# Altium PCB Rev5.PcbDoc (part 1 of 4)
Units mil, origin at the board's own origin, x right, y up, seen from the top; angles counter-clockwise.
Board outline 3019 x 2316 mil, 2 copper layers (Top Layer, Bottom Layer); 26 components, 37 nets, 159 pads, 132 vias.
Unrouted connection lines stored in the file: 2.
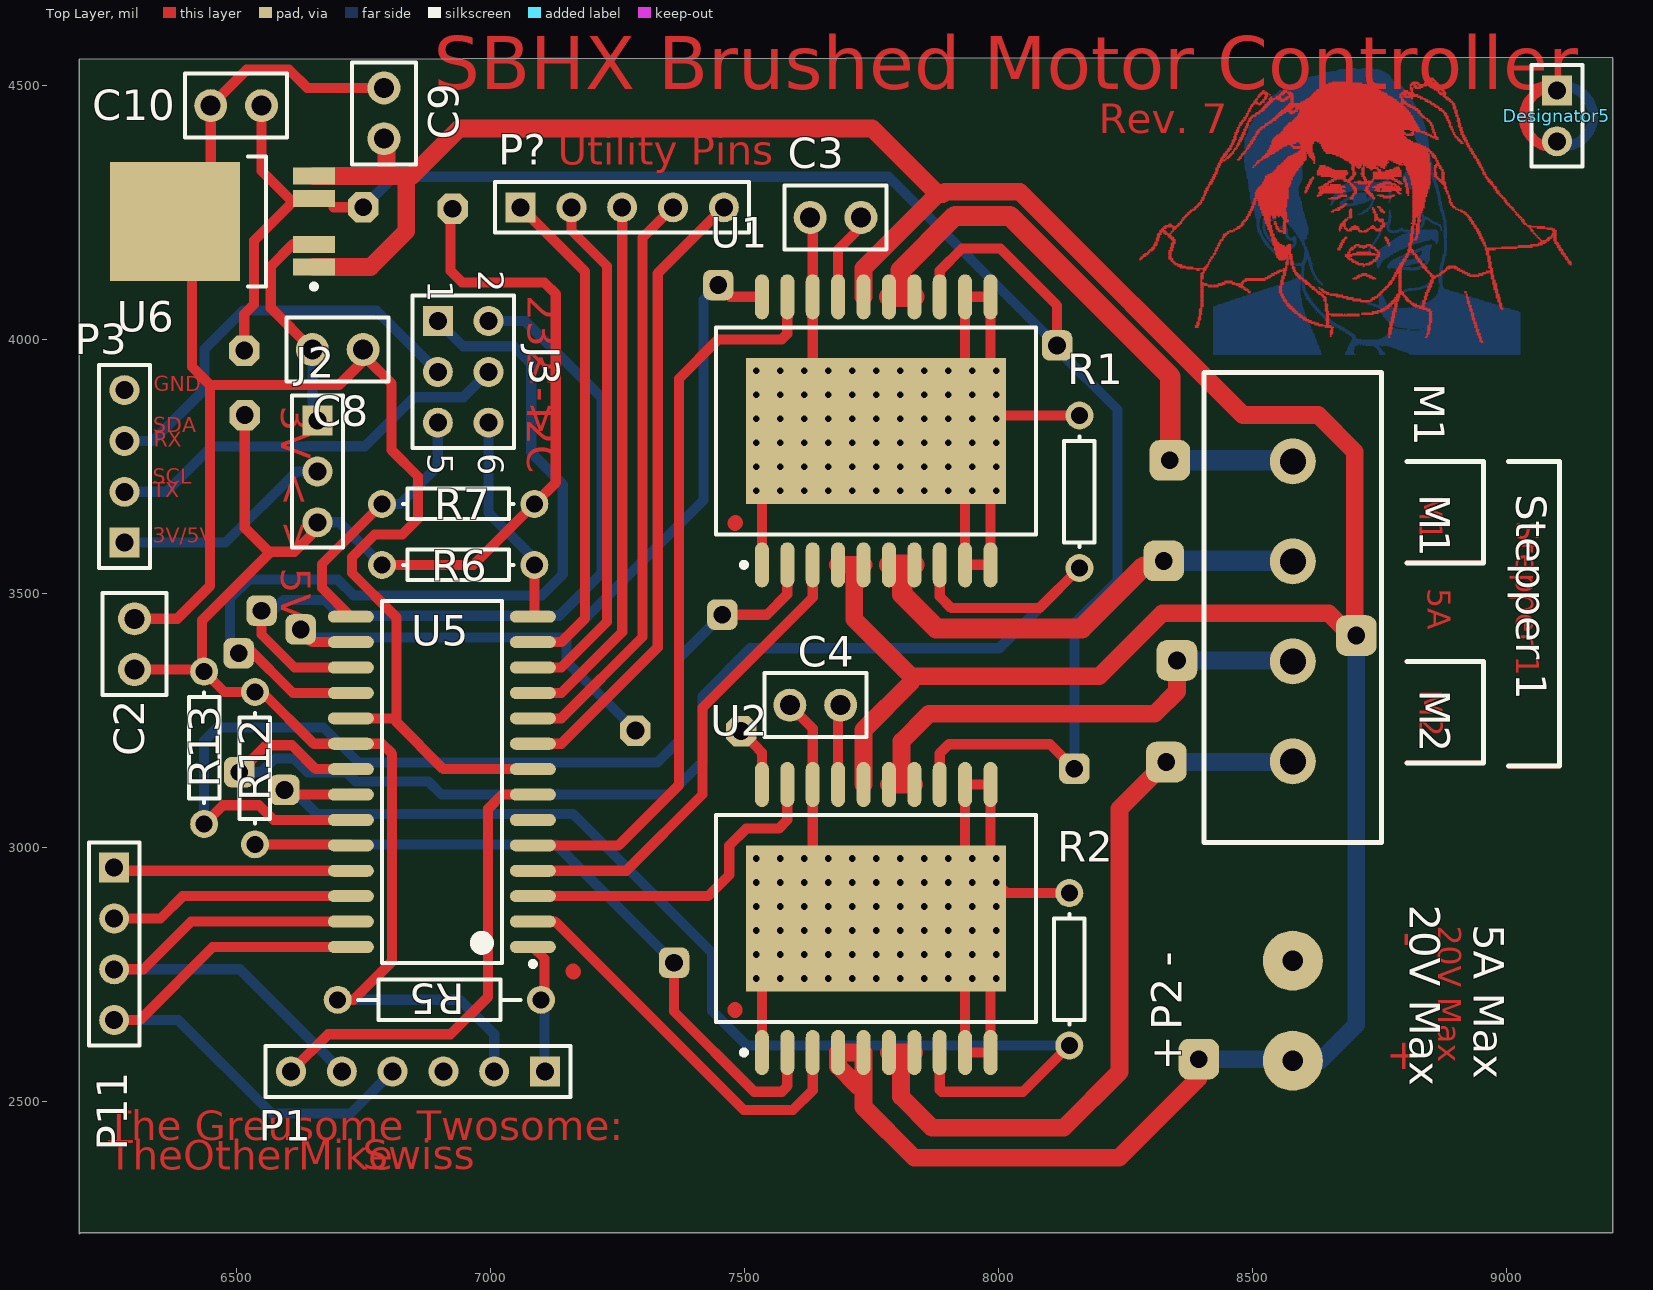
[diagram p0: Top Layer view]
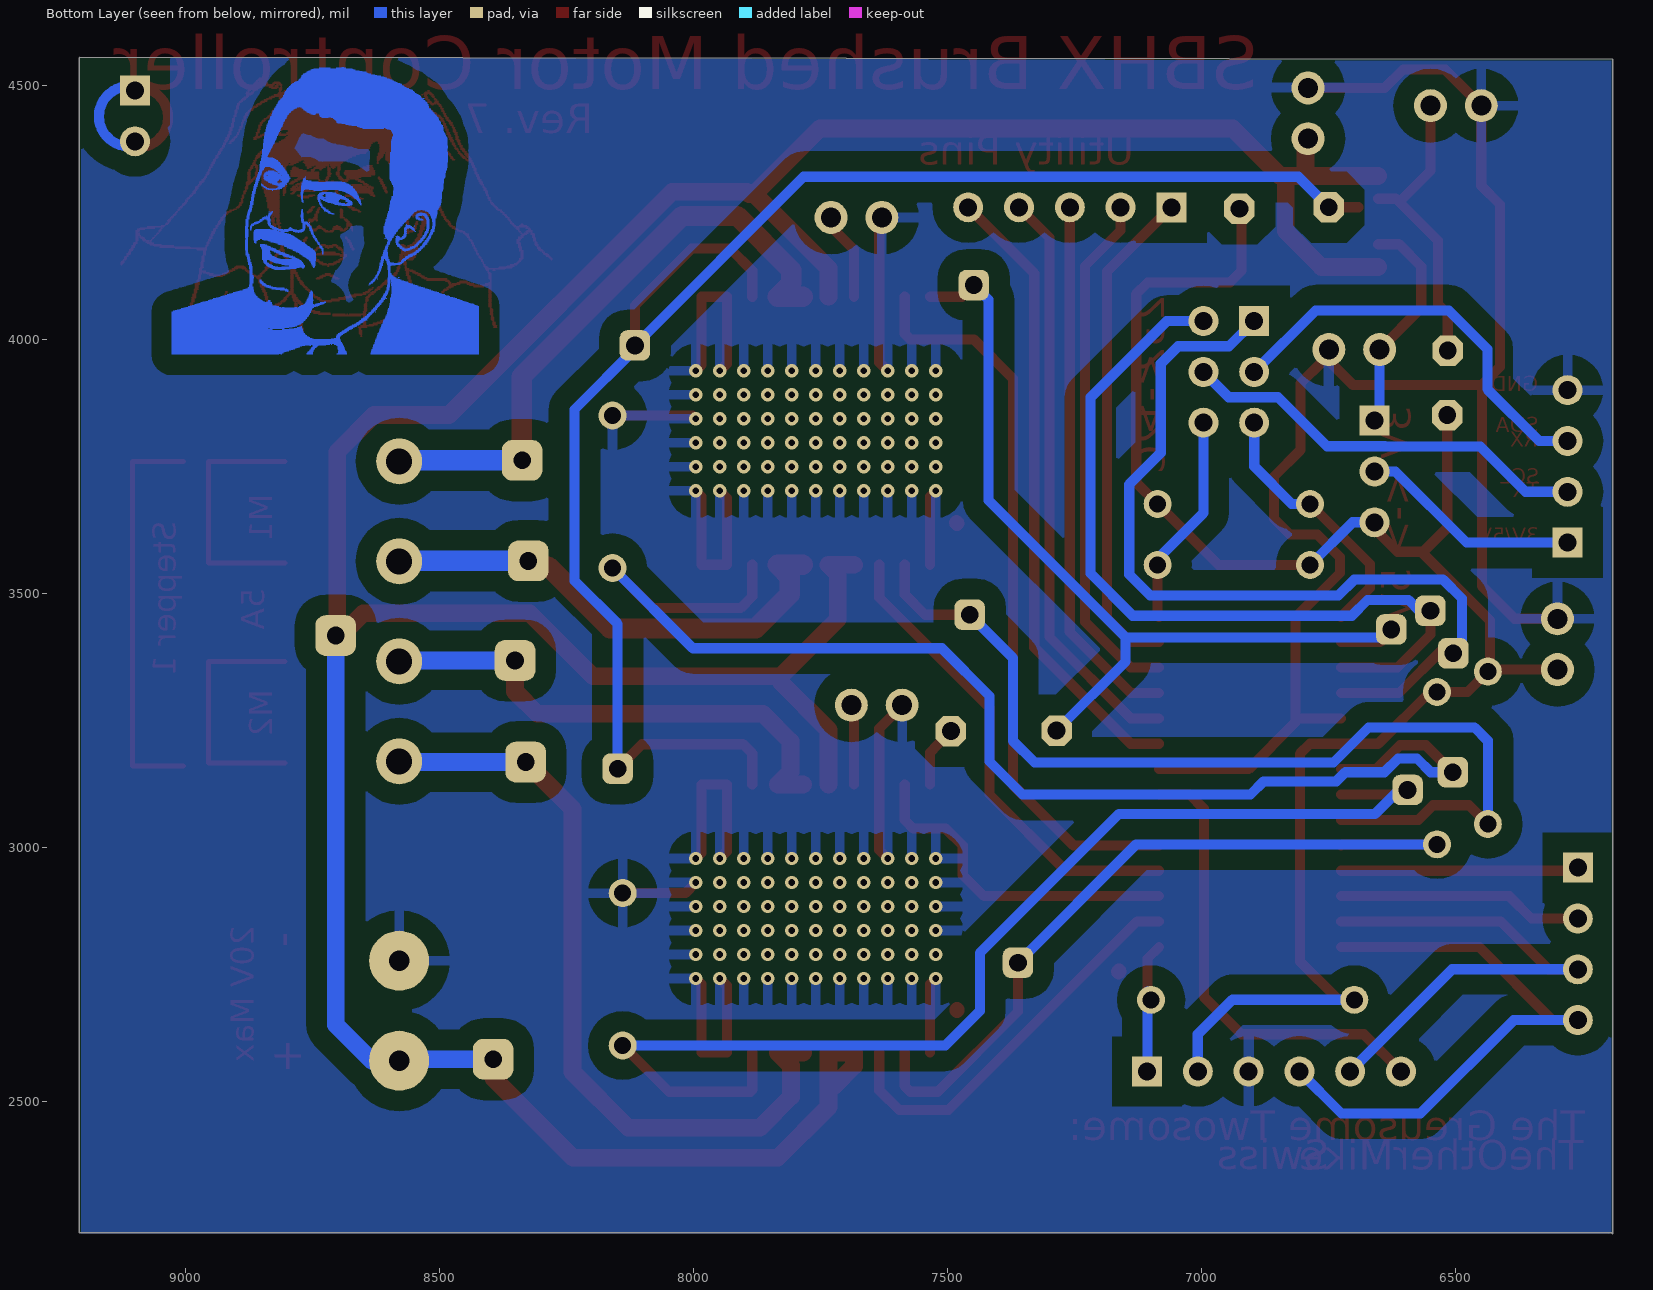
[diagram p1: Bottom Layer view, seen from below]

## Layer stack, top to bottom
Top Layer: signal copper 1.4
Dielectric: dielectric 12.6, FR-4, Dk 4.8
Bottom Layer: signal copper 1.4

## Board outline
6191,4551 6191,2239 6193,2241 9210,2241 9210,4554 9209,4555

## Design rules (kind name [scope] priority, off if disabled: settings)
Clearance "Polygon Clearance" [InPoly] p1: gap=40
Clearance [All] p2: gap=10
ComponentClearance [All] p1 off: gap=10 collisioncheckmode=3 verticalgap=10 showdistances=FALSE
HoleSize [All] p1: absolutevalues=TRUE maxlimit=100 minlimit=35 maxpercent=80.000 minpercent=20.000
MinimumSolderMaskSliver [All] p1 off: minsoldermaskwidth=10
PasteMaskExpansion [All] p1 off: expansion=0
PlaneClearance [All] p1: clearance=50
PolygonConnect [All] p1: connectstyle=Relief reliefconductorwidth=20 reliefentries=4 polygonreliefangle="90 Angle"
RoutingVias [All] p1: holewidth=28 width=50 viastyle="Through Hole" minholewidth=28 minwidth=50 maxholewidth=28 maxwidth=50
SilkToSilkClearance [All] p1 off: silktosilkclearance=7.87
SilkscreenOverComponentPads [All] p1 off: minsilkscreentomaskgap=10
SolderMaskExpansion [All] p1 off: expansion=4
Width "High Current Traces" [InNetClass('High Current')] p1: maxlimit=100 minlimit=25 preferedwidth=50 minimp=50.000000 maximp=50.000000 favimp=50.000000 checkconnectedcopper=TRUE
Width [All] p2: maxlimit=30 minlimit=20 preferedwidth=20
21 further rules are at their usual default settings.

## Classes and differential pairs
net class "High Current": NetM1_1 NetM1_2 NetM1_3 NetM1_4 VPWR

## Components (designator, comment, footprint, x,y, rotation, side; value= is the part's Value field where it differs from the comment)
C2 "Filtering" CAPR2.54-5.1x3.2 6300,3400 r90 top
C3 "Cap" CAPR2.54-5.1x3.2 7680,4240 r0 top
C4 "Cap" CAPR2.54-5.1x3.2 7640,3280 r0 top
C8 "Filtering" CAPR2.54-5.1x3.2 6700,3980 r180 top
C9 "Filtering" CAPR2.54-5.1x3.2 6791,4445 r270 top
C10 "Filtering" CAPR2.54-5.1x3.2 6500,4460 r0 top
Designator5 "Comment" BAT-2 9100,4440 r270 top
J2 "Serial Bus Voltage" HDR1X3 6660,3840 r270 top
J3 "232 / I2C Select" HDR2X3 6897,4036 r270 top
M1 "Motor Header" "MOTOR HEADER" 8580,3760 r270 top
P1 "ICSP" HDR1X6 7108,2559 r180 top
P2 "Power Header" "POWER HEADER" 8580,2580 r90 top
P3 "Serial In" HDR1X4 6280,3600 r90 top
P11 "Header 4" HDR1X4 6260,2960 r270 top
P? "Aux Header" HDR1X5 7060,4260 r0 top
R1 "Current Sense" AXIAL-0.3 8160,3700 r270 top
R2 "Current Sense" AXIAL-0.3 8140,2760 r270 top
R5 "PullUp" AXIAL-0.4 6900,2700 r0 top
R6 "Res1" AXIAL-0.3 6937,3556 r180 top
R7 "Res1" AXIAL-0.3 6937,3676 r0 top
R12 "PullUp" AXIAL-0.3 6537,3156 r270 top
R13 "PullUp" AXIAL-0.3 6437,3196 r270 top
U1 "MC33887" "HSOP20 FREESCALE" 7760,3820 r90 top
U2 "MC33887" "HSOP20 Freescale" 7760,2860 r90 top
U5 "PIC18F2221-E/SO" SOIC-SO28_N 6905,3129 r180 top
U6 "TLE4476" PG-TO252-5-1 6474,4232 r180 top

## Footprints (in the part's own frame and the unit in brackets; to place one, negate y for a bottom-side part, rotate by r counter-clockwise, add the part's x,y. Pads: shape width x height; smd on the part's side, far side on the other; paste and mask are expansions set on the pad)
AXIAL-0.3 [mm] "Axial Device, Thru-Hole; 2 Leads; 0.3 in Pin Spacing"
  round 1.4 hole 0.85: 1(-3.81,0) 2(3.81,0)
  silkscreen extent -2.77,-0.76 2.77,0.76
AXIAL-0.4 [mm] "Axial Device, Thru-Hole; 2 Leads; 0.4 in Pin Spacing"
  round 1.4 hole 0.85: 1(-5.08,0) 2(5.08,0)
  silkscreen extent -4.06,-1.02 4.06,1.02
BAT-2 [mm] "Multicell Battery; 2 Leads"
  rect 1.5x1.5 hole 0.9: 1(-1.27,0)
  round 1.5 hole 0.9: 2(1.27,0)
  silkscreen extent -2.54,-1.27 2.54,1.27
CAPR2.54-5.1x3.2 [mm] "Capacitor, Ceramic, Thru-Hole, Dipped Radial; Body 5.1 x 3.2 mm (WxT) Pin Spacing 2.54 mm (typ)"
  round 1.65 hole 1: 1(-1.27,0) 2(1.27,0)
  silkscreen extent -2.55,-1.6 2.55,1.6
HDR1X3 [mm] "Connector; Header; 3 Position"
  rect 1.5x1.5 hole 0.9: 1(0,0)
  round 1.5 hole 0.9: 2(2.54,0) 3(5.08,0)
  silkscreen extent -1.27,-1.27 6.35,1.27
HDR1X4 [mm] "Connector; Header; 4 Position"
  rect 1.5x1.5 hole 0.9: 1(0,0)
  round 1.5 hole 0.9: 2(2.54,0) 3(5.08,0) 4(7.62,0)
  silkscreen extent -1.27,-1.27 8.89,1.27
HDR1X5 [mm] "Connector; Header; 5 Position"
  rect 1.5x1.5 hole 0.9: 1(0,0)
  round 1.5 hole 0.9: 2(2.54,0) 3(5.08,0) 4(7.62,0) 5(10.16,0)
  silkscreen extent -1.27,-1.27 11.43,1.27
HDR1X6 [mm] "Connector; Header; 6 Position"
  rect 1.5x1.5 hole 0.9: 1(0,0)
  round 1.5 hole 0.9: 2(2.54,0) 3(5.08,0) 4(7.62,0) 5(10.16,0) 6(12.7,0)
  silkscreen extent -1.27,-1.27 13.97,1.27
HDR2X3 [mm] "Connector; Header; 3x2 Position"
  rect 1.5x1.5 hole 0.9: 1(0,0)
  round 1.5 hole 0.9: 2(0,2.54) 3(2.54,0) 4(2.54,2.54) 5(5.08,0) 6(5.08,2.54)
  silkscreen extent -1.27,-1.27 6.35,3.81
"HSOP20 FREESCALE" [mm] "SOP, 20-Leads, Body 16.0x11.1mm (max), Pitch 1.27mm, IPC Low Density"
  oval 2.25x0.7 smd: 1(-6.7,5.715) 2(-6.7,4.445) 3(-6.7,3.175) 4(-6.7,1.905) 5(-6.7,0.635) 6(-6.7,-0.635) 7(-6.7,-1.905) 8(-6.7,-3.175) 9(-6.7,-4.445) 10(-6.7,-5.715) 11(6.7,-5.715) 12(6.7,-4.445) 13(6.7,-3.175) 14(6.7,-1.905) 15(6.7,-0.635) 16(6.7,0.635) 17(6.7,1.905) 18(6.7,3.175) 19(6.7,4.445) 20(6.7,5.715)
  rect 7.3x13 smd: 21(0,0)
  silkscreen extent -6.82,-8 5.18,8, body extent -5.55,-8 5.55,8, height 3.4
"HSOP20 Freescale" [mm] "SOP, 20-Leads, Body 16.0x11.1mm (max), Pitch 1.27mm, IPC Low Density"
  oval 2.25x0.7 smd: 1(-6.7,5.715) 2(-6.7,4.445) 3(-6.7,3.175) 4(-6.7,1.905) 5(-6.7,0.635) 6(-6.7,-0.635) 7(-6.7,-1.905) 8(-6.7,-3.175) 9(-6.7,-4.445) 10(-6.7,-5.715) 11(6.7,-5.715) 12(6.7,-4.445) 13(6.7,-3.175) 14(6.7,-1.905) 15(6.7,-0.635) 16(6.7,0.635) 17(6.7,1.905) 18(6.7,3.175) 19(6.7,4.445) 20(6.7,5.715)
  rect 7.3x13 smd: 21(0,0)
  silkscreen extent -6.82,-8 5.18,8, body extent -5.55,-8 5.55,8, height 3.4
"MOTOR HEADER" [mm] "Custom header for motor connections"
  round 2.3 hole 1.3: 1(0,0) 2(5,0) 3(10,0) 4(15,0)
  Top Layer lines w0.254: 15.08,5.715 15.08,9.525 10,9.525 10,5.715 ; 5.08,5.715 5.08,9.525 0,9.525 0,5.715 ; 15.24,10.795 15.24,13.335 0,13.335 0,10.795
  silkscreen extent -4.45,-4.45 19.05,13.34, body extent -2.49,-4.56 17.51,4.44, height 15.2
PG-TO252-5-1 [mm] "D-PAK, 5-Pads, Body 6.2x6.5mm (max), IPC Low Density"
  rect 2.1x0.85 smd: 1(-4.55,2.28) 2(-4.55,1.14) 4(-4.55,-1.14) 5(-4.55,-2.28)
  rect 6.5x5.95 smd: 3(2.4,0)
  silkscreen extent -4.67,-3.25 -1.25,3.38, body extent -2.15,-3.25 4.07,3.25, height 2.38
"POWER HEADER" [mm] "Custom header for power in"
  round 3 hole 1.016: 1(0,0) 2(5,0)
  body extent -2.49,-4.55 7.51,4.45, height 15.2
SOIC-SO28_N [mm] "SOIC, 28-Leads, Body 17.9x7.5mm, Pitch 1.27mm, IPC Medium Density"
  oval 2.3x0.6 smd: 1(-4.55,8.255) 2(-4.55,6.985) 3(-4.55,5.715) 4(-4.55,4.445) 5(-4.55,3.175) 6(-4.55,1.905) 7(-4.55,0.635) 8(-4.55,-0.635) 9(-4.55,-1.905) 10(-4.55,-3.175) 11(-4.55,-4.445) 12(-4.55,-5.715) 13(-4.55,-6.985) 14(-4.55,-8.255) 15(4.55,-8.255) 16(4.55,-6.985) 17(4.55,-5.715) 18(4.55,-4.445) 19(4.55,-3.175) 20(4.55,-1.905) 21(4.55,-0.635) 22(4.55,0.635) 23(4.55,1.905) 24(4.55,3.175) 25(4.55,4.445) 26(4.55,5.715) 27(4.55,6.985) 28(4.55,8.255)
  silkscreen extent -4.67,-9.05 3,9.23, body extent -3.8,-9.06 3.8,9.06, height 2.65

## Part data
C2 C8 C9 C10: library part Cap, "Capacitor"
C3 C4: "Capacitor"
J2: library part "Header 3", "Header, 3-Pin"
J3: library part "Header 3X2", "Header, 3-Pin, Dual row"
P1: library part "Header 6", "Header, 6-Pin"
P3: library part "Header 4", "Header, 4-Pin"
P11: "Header, 4-Pin"
P?: library part "Header 5", "Header, 5-Pin"
R1: library part Res1, "1% Non Wirewound"
R2 R5 R12 R13: library part Res1, "Resistor"
R6 R7: "Resistor"
U1 U2: "H-Bridge"
U5: "Enhanced Flash Microcontroller with 10-Bit A/D and nanoWatt Technology, 4K Flash, 28-Pin SOIC, Extended Temperature Range"
U6: "3V3 / 5V0 LDO regulator"

## Free pads (board coordinates)
  rrect50% 80x80 hole 35: 0(8331,3168) 1(8352,3368) 2(8326,3564) 3(8338,3762) 6(8395,2583) 7(8705,3417)
  oct 60x60 hole 35: 1(6750,4260) 4(6516,3978) 4(6926,4257) 5(6517,3851) 7(7286,3230) 8(7494,3229)
  rrect50% 60x60 hole 35: 2(7362,2773) 9(6595,3113) 10(6506,3148) 11(6505,3382) 14(7457,3458) 15(7449,4107) 16(8116,3988) 17(8150,3155) 18(6550,3466) 19(6627,3429)

## Via types
v1: diameter 25.98, hole 12.99, Top Layer to Bottom Layer, tented top, 132 vias

## Nets (pads, with @x,y where several pads share a name; then routed paths per layer and width w, separated by ;. In a path a pad name is that pad's centre, name@x,y a point inside that pad or via, vN(x,y) a via of type N, cw(c..) or ccw(c..) an arc to the next point about the centre after c; other vN are vias at no path point)
3V3: C8.2 J2.1 U6.2 | length 444.8
  Top Layer w20: C8.2@6650,3980 6568,4062 6568,4143.46 6611.66,4187.12 U6.2@6653.13,4187.12
  Bottom Layer w20: C8.2@6650,3980 6650,3850 J2.1@6660,3840
3V3/5V0: J2.2 P3.1 | length 438
  Bottom Layer w20: P3.1@6280,3600 6479,3600 6619,3740 J2.2@6660,3740
5V0: C2.1 C10.2 J2.3 P1.2 pad.1@6750,4260 pad.4 pad.5 pad.16 pad.17 R5.1 R6.2 R7.2 R12.1 R13.1 U1.13 U2.13 U5.20 U6.4 | length 7389.2
  Top Layer w20: C2.1@6300,3350 R13.1@6433,3350 ; pad.4@6516,3978 6516,4050 6535,4069 6535,4194 6617.88,4276.88 U6.4@6653.13,4276.88 ; pad.5@6517,3851 6517,3629 6564,3582 ; C10.2@6550,4460 6550,4332 6605.12,4276.88 ; J2.3@6660,3640 6660,3627 6615,3582 6568,3582 6433,3447 R13.1@6433,3350 ; 6692,4260 pad.1@6750,4260 ; R5.1@6701,2700 6731,2700 6807,2776 6807,3184 6787,3204 U5.20@6725.87,3204 6653,3204 6551,3306 R12.1@6537,3306 6477,3306 R13.1@6437,3346 R13.1@6433,3350 ; R6.2@6787,3556 6967,3556 R7.2@7087,3676 7129,3718 7129,4089.6 7106.6,4112 6945,4112 6922,4135 pad.4@6922,4257 ; U2.13@7885,3123.78 7885,3185 7903,3203 8102,3203 pad.17@8150,3155 ; U1.13@7885,4083.78 7885,4135 7929,4179 8004,4179 8116,4067 pad.16@8116,3988
  Bottom Layer w20: J2.3@6660,3640 6703,3640 R6.2@6787,3556 ; R5.1@6700,2700 6940,2700 7008,2632 P1.2@7008,2559 ; pad.1@6750,4260 6810,4320 7784,4320 pad.16@8116,3988 8112.44,3984.44 8235,3861.88 8235,3525.01 8150,3440.01 pad.17@8150,3155
9: P?.5 U5.9 | length 1244.4
  Top Layer w20: U5.9@7084.13,3204 7140,3204 7330,3394 7330,4130 P?.5@7460,4260
10: P?.4 U5.10 | length 1153
  Top Layer w20: U5.10@7084.13,3254 7140,3254 7300,3414 7300,4200 P?.4@7360,4260
11: P?.3 U5.11 | length 1061.6
  Top Layer w20: U5.11@7084.13,3304 7140,3304 7260,3424 P?.3@7260,4260
12: P?.2 U5.12 | length 1028.1
  Top Layer w20: U5.12@7084.13,3354 7140,3354 7230,3444 7230,4144.43 7160,4214.43 P?.2@7160,4260
13: P?.1 U5.13 | length 983.9
  Top Layer w20: P?.1@7060,4260 7187,4133 7187,3451 7140,3404 U5.13@7084.13,3404
AUX: P1.6 U5.7 | length 918.6
  Top Layer w20: P1.6@6608,2559 6681,2632 6922,2632 6996,2706 6996,3076 7024,3104 U5.7@7084.13,3104
EN: pad.7@7286,3230 pad.8 pad.15 pad.19 U1.20 U2.20 U5.16 | length 1875
  Top Layer w20: pad.19@6640,3413 6649,3404 U5.16@6725.87,3404 ; pad.15@7449,4107 7472.22,4083.78 U1.20@7535,4083.78 ; pad.8@7494,3230 7535,3187 U2.20@7535,3123.78
  Bottom Layer w20: pad.19@6640,3413 7150,3413 ; pad.7@7286,3230 7150,3366 7150,3413 ; pad.15@7449,4107 7420,4078 7420,3683 7150,3413
ENC0: P11.1 U5.25 | length 459.9
  Top Layer w20: P11.1@6266,2954 U5.25@6725.87,2954
ENC1: P11.2 U5.26 | length 484.1
  Top Layer w20: P11.2@6260,2860 6351,2860 6395,2904 U5.26@6725.87,2904
ENC2/PGC: P1.5 P11.3 U5.27 | length 1036.1
  Top Layer w20: P11.3@6260,2760 6317.57,2760 6411.57,2854 U5.27@6725.87,2854
  Bottom Layer w20: P11.3@6260,2760 6507,2760 P1.5@6708,2559
ENC3/PGD: P1.4 P11.4 U5.28 | length 1184.1
  Top Layer w20: P11.4@6260,2660 6310,2660 6454,2804 U5.28@6725.87,2804
  Bottom Layer w20: P11.4@6260,2660 6386,2660 6570,2476 6725,2476 P1.4@6808,2559
FAULT0: pad.14 R13.2 U1.2 U5.23 | length 1958.4
  Top Layer w20: R13.2@6437,3046 6474,3083 6545,3083 6574,3054 U5.23@6725.87,3054 ; pad.14@7457,3458 7545,3458 7585,3498 U1.2@7585,3556.22
  Bottom Layer w20: R13.2@6437,3046 6437,3210 6463,3236 6672,3236 6741,3167 7329,3167 7372,3210 7372,3373 pad.14@7457,3458
FAULT1: pad.2@7362,2773 R12.2 U2.2 U5.24 | length 1569.3
  Top Layer w20: R12.2@6537,3006 6723.87,3006 U5.24@6725.87,3004 ; pad.2@7362,2773 7362,2677 7520,2519 7574,2519 7585,2530 U2.2@7585,2596.22
  Bottom Layer w20: R12.2@6537,3006 7129,3006 pad.2@7364,2771
GND: C2.2 C3.1 C4.1 C8.1 C9.1 C10.1 P1.3 P2.2 P3.4 R1.1 R2.1 U1.1 U1.9 U1.10 U1.11 U1.12 U1.18 U1.21 U2.1 U2.9 U2.10 U2.11 U2.12 U2.18 U2.21 U5.8 U5.19 U6.3 | length 5795.8
  Top Layer w20: C2.2@6300,3450 6384,3450 6448.8,3514.8 6448.8,3910 ; U5.19@6725.87,3254 6816,3254 6816,3452 6728,3540 6728,3571 6773,3616 6827,3616 6858,3647 6858,3730 6806,3782 6806,3913 6761,3958 6750,3958 6702,3910 6448.8,3910 ; C9.1@6791,4495 6640,4495 6604,4531 6521,4531 C10.1@6450,4460 6450,4302.49 6413,4265.49 6413,3945.8 6448.8,3910 ; 6816,3246 6908,3154 U5.8@7084.13,3154 ; v1(7523.78,2741.89) 7535,2730.67 U2.1@7535,2596.22 ; v1(7523.78,3701.89) 7535,3690.67 U1.1@7535,3556.22 ; C4.1@7590,3280 7590,3279 7635,3234 U2.18@7635,3123.78 7635,2994.84 v1(7618.27,2978.11) ; v1(7618.27,3938.11) 7635,3954.84 U1.18@7635,4083.78 7635,4235 C3.1@7630,4240 ; v1(7948.98,2741.89) 7935,2727.91 U2.9@7935,2596.22 U2.10@7985,2596.22 7985,2730.67 v1(7996.22,2741.89) ; v1(7948.98,2978.11) 7935,2992.09 U2.12@7935,3123.78 U2.11@7985,3123.78 7985,2989.33 v1(7996.22,2978.11) ; v1(7948.98,3701.89) 7935,3687.91 U1.9@7935,3556.22 U1.10@7985,3556.22 7985,3690.67 v1(7996.22,3701.89) ; v1(7948.98,3938.11) 7935,3952.09 U1.12@7935,4083.78 U1.11@7985,4083.78 7985,3949.33 v1(7996.22,3938.11) ; v1(7996.22,2930.87) 8017.09,2910 R2.1@8140,2910 ; v1(7996.22,3843.62) 8002.6,3850 R1.1@8160,3850
  other v1: 7571.02,2741.89 7618.27,2741.89 7665.51,2741.89 7712.76,2741.89 7760,2741.89 7807.24,2741.89 7854.49,2741.89 7901.73,2741.89 7523.78,2789.13 7571.02,2789.13 7618.27,2789.13 7665.51,2789.13 7712.76,2789.13 7760,2789.13 7807.24,2789.13 7854.49,2789.13 7901.73,2789.13 7948.98,2789.13 7996.22,2789.13 7523.78,2836.38 7571.02,2836.38 7618.27,2836.38 7665.51,2836.38 7712.76,2836.38 7760,2836.38 7807.24,2836.38 7854.49,2836.38 7901.73,2836.38 7948.98,2836.38 7996.22,2836.38 7523.78,2883.62 7571.02,2883.62 7618.27,2883.62 7665.51,2883.62 7712.76,2883.62 7760,2883.62 7807.24,2883.62 7854.49,2883.62 7901.73,2883.62 7948.98,2883.62 7996.22,2883.62 7523.78,2930.87 7571.02,2930.87 7618.27,2930.87 7665.51,2930.87 7712.76,2930.87 7760,2930.87 7807.24,2930.87 7854.49,2930.87 7901.73,2930.87 7948.98,2930.87 7523.78,2978.11 7571.02,2978.11 7665.51,2978.11 7712.76,2978.11 7760,2978.11 7807.24,2978.11 7854.49,2978.11 7901.73,2978.11 7571.02,3701.89 7618.27,3701.89 7665.51,3701.89 7712.76,3701.89 7760,3701.89 7807.24,3701.89 7854.49,3701.89 7901.73,3701.89 7523.78,3749.13 7571.02,3749.13 7618.27,3749.13 7665.51,3749.13 7712.76,3749.13 7760,3749.13 7807.24,3749.13 7854.49,3749.13 7901.73,3749.13 7948.98,3749.13 7996.22,3749.13 7523.78,3796.38 7571.02,3796.38 7618.27,3796.38 7665.51,3796.38 7712.76,3796.38 7760,3796.38 7807.24,3796.38 7854.49,3796.38 7901.73,3796.38 7948.98,3796.38 7996.22,3796.38 7523.78,3843.62 7571.02,3843.62 7618.27,3843.62 7665.51,3843.62 7712.76,3843.62 7760,3843.62 7807.24,3843.62 7854.49,3843.62 7901.73,3843.62 7948.98,3843.62 7523.78,3890.87 7571.02,3890.87 7618.27,3890.87 7665.51,3890.87 7712.76,3890.87 7760,3890.87 7807.24,3890.87 7854.49,3890.87 7901.73,3890.87 7948.98,3890.87 7996.22,3890.87 7523.78,3938.11 7571.02,3938.11 7665.51,3938.11 7712.76,3938.11 7760,3938.11 7807.24,3938.11 7854.49,3938.11 7901.73,3938.11
IFB0: pad.10 R1.2 U1.8 U5.21 | length 2595.7
  Top Layer w20: pad.10@6506,3148 6559,3201 6610,3201 6657,3154 U5.21@6725.87,3154 ; U1.8@7885,3556.22 7885,3494 7908,3471 8081,3471 R1.2@8160,3550
  Bottom Layer w20: pad.10@6506,3148 6549.36,3148 6576.36,3175 6613.64,3175 6640.64,3148 6717.57,3148 6735.57,3130 6878.29,3130 6904.29,3104 7353,3104 7418,3169 7418,3298 7512,3392 8002,3392 R1.2@8160,3550
IFB1: pad.9 R2.2 U2.8 U5.22 | length 2336.4
  Top Layer w20: pad.9@6595,3130 6621,3104 U5.22@6725.87,3104 ; U2.8@7885,2596.22 7885,2523 7889,2519 8049,2519 R2.2@8140,2610
  Bottom Layer w20: pad.9@6595,3130 6659,3066 7163,3066 7437,2792 7437,2678 7505,2610 R2.2@8140,2610
M0-1: U1.19 U5.5 | length 1459.4
  Top Layer w20: U5.5@7084.13,3004 7253,3004 7372,3123 7372,3923 7449,4000 7574,4000 7585,4011 U1.19@7585,4083.78
M0-2: U1.3 U5.4 | length 938.1
  Top Layer w20: U5.4@7084.13,2954 7268,2954 7418,3104 7418,3275 7635,3492 U1.3@7635,3556.22
M1-1: U2.19 U5.3 | length 666.8
  Top Layer w20: U5.3@7084.13,2904 7429,2904 7470.75,2945.75 7470.75,3003.75 7504,3037 7568,3037 7585,3054 U2.19@7585,3123.78
M1-2: U2.3 U5.2 | length 794.9
  Top Layer w20: U5.2@7084.13,2854 7128,2854 7499,2483 7596,2483 7635,2522 U2.3@7635,2596.22
M\C\L\R\: P1.1 R5.2 U5.1 | length 274.9
  Top Layer w20: U5.1@7084.13,2804 7107,2781.13 R5.2@7107,2696
  Bottom Layer w20: R5.2@7107,2716 7107,2560 P1.1@7108,2559
NetC3_2: C3.2 U1.17 | length 174.9
  Top Layer w20: U1.17@7685,4083.78 7685,4177 7730,4222 C3.2@7730,4240
NetC4_2: C4.2 U2.17 | length 158.3
  Top Layer w20: U2.17@7685,3123.78 7685,3275 C4.2@7690,3280
NetM1_1: M1.1 pad.3 U1.14 U1.15 | length 1227.4
  Top Layer w40: U1.15@7785,4083.78 U1.14@7835,4083.78 7808,4110.78 7808,4136 7915,4243 8023,4243 8339,3927 pad.3@8339,3762
  Bottom Layer w40: pad.3@8338,3762 8578,3762 M1.1@8580,3760
NetM1_2: M1.2 pad.2@8326,3564 U1.6 U1.7 | length 968.8
  Top Layer w40: U1.6@7785,3556.22 U1.7@7835,3556.22 7811,3532.22 7811,3498 7878,3431 8165,3431 8287,3553 pad.2@8329,3553
  Bottom Layer w40: pad.2@8326,3564 8579.15,3564 M1.2@8580,3563.15
NetM1_3: M1.3 pad.1@8352,3368 U2.14 U2.15 | length 1017.9
  Top Layer w35: U2.15@7785,3123.78 U2.14@7835,3123.78 7810,3148.78 7810,3209 7864,3263 8308,3263 8352,3307 pad.1@8352,3368
  Bottom Layer w35: pad.1@8352,3368 8578.3,3368 M1.3@8580,3366.3
NetM1_4: M1.4 pad.0 U2.6 U2.7 | length 1546.5
  Top Layer w35: U2.6@7785,2596.22 U2.7@7835,2596.22 7809,2570.22 7809,2509 7870,2448 8129,2448 8239,2558 8239,3076 pad.0@8331,3168
  Bottom Layer w35: pad.0@8331,3168 8578.55,3168 M1.4@8580,3169.45
RX: J3.1 pad.11 U5.18 | length 1756.1
  Top Layer w20: pad.11@6495,3392 6524,3392 6612,3304 U5.18@6725.87,3304
  Bottom Layer w20: pad.11@6495,3392 pad.11@6505,3382 6488,3399 6488,3490 6525,3527 6700,3527 6731,3496 7102,3496 7143,3537 7143,3714.57 7080.79,3776.79 7080.79,3952.21 7046.53,3986.47 6946.53,3986.47 J3.1@6897,4036
SCL: J3.6 R6.1 U5.14 | length 420.5
  Top Layer w20: U5.14@7084.13,3454 7087,3456.87 R6.1@7087,3556
  Bottom Layer w20: J3.6@6997,3836 6997,3658 7087,3568 R6.1@7087,3556
SDA: J3.5 R7.1 U5.15 | length 532.4
  Top Layer w20: U5.15@6725.87,3454 6669,3510.87 6669,3558 R7.1@6787,3676 R7.1@6795,3684
  Bottom Layer w20: R7.1@6787,3676 6823,3676 6897,3750 J3.5@6897,3836
SERIAL1: J3.4 P3.2 | length 814.8
  Bottom Layer w20: P3.2@6280,3700 6363,3700 6452,3789 6638.96,3789 6639.48,3789.53 6753.53,3789.53 6850,3886 6947,3886 J3.4@6997,3936
SERIAL2: J3.3 P3.3 | length 819.8
  Bottom Layer w20: P3.3@6280,3800 6336,3800 6438,3902 6438,3981 6514,4057 6776,4057 J3.3@6897,3936
TX: J3.2 pad.18 U5.17 | length 1605.8
  Top Layer w20: pad.18@6550,3466 6550,3419 6615,3354 U5.17@6725.87,3354
  Bottom Layer w20: pad.18@6550,3466 6572,3466 6593,3487 6674,3487 6705,3456 7136,3456 7219,3539 7219,3886 7069,4036 J3.2@6997,4036
VPWR: C9.2 P2.1 pad.6 pad.7@8705,3417 U1.4 U1.5 U1.16 U2.4 U2.5 U2.16 U6.1 U6.5 | length 7055.3
  Top Layer w35: U6.1@6653.13,4142.24 6764.24,4142.24 6835,4213 6835,4314 6827.24,4321.76 ; U6.5@6653.13,4321.76 6796,4321.76 ; C9.2@6791,4395 6796,4390 6796,4321.76 ; U1.4@7685,3556.22 U1.5@7735,3556.22 7716.78,3538 7716.78,3449.22 7829,3337 ; 7724,2530 7685,2569 U2.4@7685,2596.22 U2.5@7735,2596.22 7735,2489 7835,2389 8237.89,2389 8395,2546.11 pad.6@8395,2583 ; U2.16@7735,3123.78 7735,3231 7829,3325 7829,3337 ; U1.16@7735,4083.78 7735,4140 7881,4286 ; 6796,4321.76 6827.24,4321.76 ; 6827.24,4321.76 6845.76,4321.76 6939,4415 7752,4415 7881,4286 ; 7829,3337 8199,3337 8323,3461 8651,3461 8702,3410 8702,3779 8630,3851 8482.18,3851 8042.68,4290.5 7895.32,4290.5 7890.82,4286 7881,4286
  Bottom Layer w35: pad.6@8395,2583 8577,2583 P2.1@8580,2580 8634,2580 8705,2651 pad.7@8705,3417
pads on no net: Designator5.1 Designator5.2 U5.6